# Altium PCB JH_2651M.PcbDoc (part 2 of 2)
Units mm, origin at the board's own origin, x right, y up, seen from the top; angles counter-clockwise.
Board outline 17.32 x 28.93 mm, 4 copper layers (TopLayer, MidLayer1, MidLayer2, BottomLayer); 57 components, 67 nets, 222 pads, 169 vias.
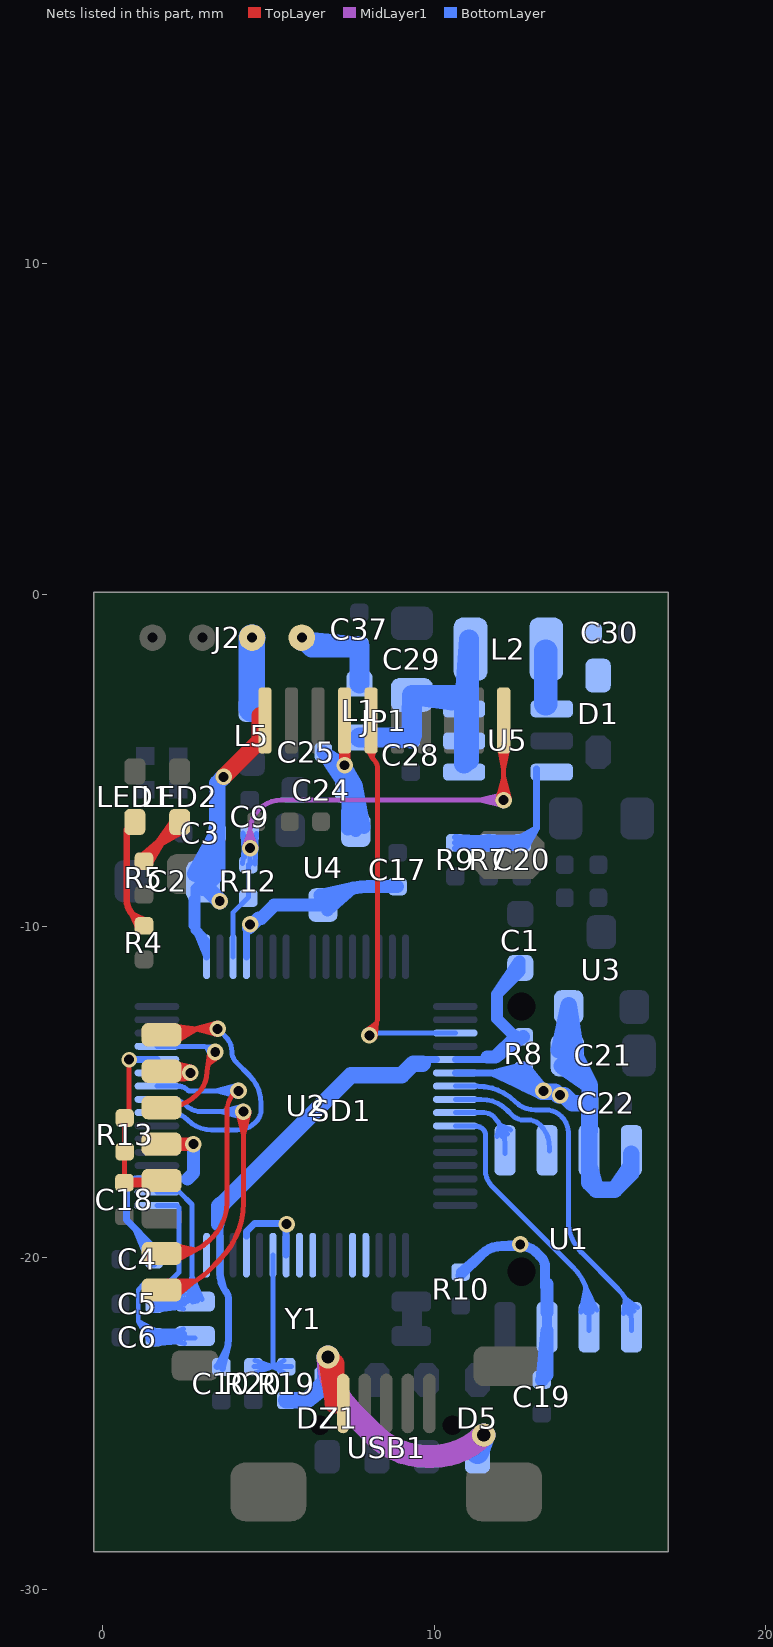
[diagram p4: the nets of this part, all layers, seen from the top]

## Via types
v1: diameter 0.5, hole 0.3, TopLayer to BottomLayer, tented both sides, 163 vias
v2: diameter 0.7, hole 0.4, TopLayer to BottomLayer, tented both sides, 5 vias
v3: diameter 0.47, hole 0.3, TopLayer to BottomLayer, tented both sides, 1 vias

## Nets (pads, with @x,y where several pads share a name; then routed paths per layer and width w, separated by ;. In a path a pad name is that pad's centre, name@x,y a point inside that pad or via, vN(x,y) a via of type N, cw(c..) or ccw(c..) an arc to the next point about the centre after c; other vN are vias at no path point) (continued)
MDP: JP1.5 U2.35 | length 14.1
  TopLayer w0.15: v1@7.908,-13.3 v1(8.05,-13.3) ccw(c7.451,-12.701) 8.298,-12.701 8.298,-5.265 ccw(c7.885,-5.265) 8.177,-4.973 cw(c8.363,-4.787) 8.1,-4.787 JP1.5@8.1,-4.65 ; v1@7.919,-13.184 8.269,-12.92 v1@8.216,-13.355 ; JP1.5@7.981,-4.638 8.135,-4.919 ; JP1.5@8.1,-4.6 8.135,-4.919 ; JP1.5@8.225,-4.611 8.135,-4.919
  BottomLayer w0.15: v1@7.9,-13.3 7.973,-13.227 U2.35@10.64,-13.227 ; 9.515,-13.227 U2.35@10.07,-13.227
MICBIAS: U2.57
MICP: U2.56
MICVREF: U2.52
NetC20_2: C20.2 R7.2 R9.1 U5.3 | length 32.3
  BottomLayer w0.2: R9.1@10.641,-7.658 R7.2@11.513,-7.637 ; R9.1@10.64,-7.492 R7.2@11.65,-7.492 C20.2@12.65,-7.492 13.09,-7.052 ; R9.1@10.641,-7.326 R7.2@11.513,-7.347 ; R9.1@10.696,-7.653 R7.2@11.513,-7.347 ; R9.1@10.696,-7.331 R7.2@11.513,-7.637 ; R7.2@11.621,-7.658 R9.1@10.771,-7.492 ; R7.2@11.621,-7.326 R9.1@10.771,-7.492 ; R7.2@11.637,-7.492 R9.1@10.771,-7.492 ; R7.2@11.663,-7.492 C20.2@12.529,-7.492 ; R7.2@11.679,-7.658 C20.2@12.529,-7.492 ; R7.2@11.679,-7.326 C20.2@12.529,-7.492 ; C20.2@12.56,-7.361 13.09,-7.052 ; C20.2@12.594,-7.653 R7.2@11.778,-7.345 ; C20.2@12.594,-7.331 R7.2@11.778,-7.639 ; C20.2@12.649,-7.658 R7.2@11.778,-7.639 ; C20.2@12.649,-7.326 R7.2@11.778,-7.345 ; C20.2@12.663,-7.492 13.09,-7.052 ; C20.2@12.797,-7.591 13.09,-7.052 ; U5.3@13.09,-5.26 13.09,-7.052 ; R9.1@10.653,-7.492 R7.2@11.519,-7.492 ; R9.1@10.653,-7.492 R7.2@11.513,-7.347 ; R9.1@10.653,-7.492 R7.2@11.519,-7.492 ; R9.1@10.653,-7.492 R7.2@11.513,-7.637 ; R7.2@11.519,-7.492 10.669,-7.326 R7.2@11.519,-7.492 ; R7.2@11.519,-7.492 10.669,-7.658 R7.2@11.519,-7.492 ; R7.2@11.771,-7.492 12.621,-7.658 R7.2@11.771,-7.492 ; R7.2@11.771,-7.492 12.621,-7.326 R7.2@11.771,-7.492 ; R7.2@11.771,-7.492 C20.2@12.637,-7.492 ; R7.2@11.771,-7.492 C20.2@12.637,-7.492 ; R7.2@11.778,-7.639 C20.2@12.637,-7.492 ; R7.2@11.778,-7.345 C20.2@12.637,-7.492
NetC30_2: C30.2 D1.1 L2.2 U5.1 | length 1.6
  BottomLayer w0.7: U5.1@13.372,-3.3 L2.2@13.372,-1.7
NetC37_1: C37.1 J2.1 L1.1 | length 9
  BottomLayer w0.6: J2.1@6.01,-1.3 J2.1@6.31,-1.6 ; C37.1@7.75,-1.558 L1.1@7.75,-2.687 C37.1@7.75,-1.6 ; J2.1@6.31,-1.6 7.737,-1.558 6.01,-1.4 C37.1@7.75,-1.6 ; J2.1@6.31,-1.6 C37.1@7.75,-1.6
NetLED1_1: LED1.1 R4.1 | length 4.9
  TopLayer w0.2: LED1.1@0.973,-6.862 0.731,-7.104 0.731,-9.228 ccw(c1.322,-9.228) 0.904,-9.646 ; R4.1@1.099,-10.085 0.904,-9.646 ; R4.1@1.237,-9.992 0.904,-9.646 ; R4.1@1.25,-9.992 0.904,-9.646 ; R4.1@1.335,-9.857 0.904,-9.646
NetLED2_1: LED2.1 R5.1 | length 7.5
  TopLayer w0.2: R5.1@1.145,-7.924 1.882,-7.307 ; R5.1@1.25,-8.042 1.25,-7.939 LED2.1@2.327,-6.862 ; R5.1@1.263,-8.042 1.882,-7.307 ; R5.1@1.399,-8.138 1.882,-7.307 ; LED2.1@2.165,-6.793 1.585,-7.604 ; LED2.1@2.327,-6.938 1.585,-7.604 ; LED2.1@2.454,-7.115 1.585,-7.604
PGND: J2.2 L5.1 | length 2.2
  BottomLayer w0.8: L5.1@4.5,-3.45 4.5,-1.324 cw(c4.534,-1.324) J2.2@4.51,-1.3
PWR_ON1: R19.2 R20.1 U2.59 | length 7.8
  BottomLayer w0.15: R20.1@4.563,-23.292 5.14,-23.292 ; R20.1@4.595,-23.481 5.14,-23.292 ; R20.1@4.595,-23.103 5.14,-23.292 ; R20.1@4.704,-23.292 5.14,-23.292 ; 5.14,-21.052 U2.59@5.14,-20.497 ; U2.59@5.14,-19.927 5.14,-23.292 ; R19.2@5.48,-23.478 5.14,-23.292 ; R19.2@5.48,-23.106 5.14,-23.292 ; R19.2@5.527,-23.292 5.14,-23.292 ; R19.2@5.7,-23.292 R19.2@5.54,-23.292 5.14,-23.292
SDC_CLK: 
SDC_CMD: SD1.3 U2.13 | length 7.2
  TopLayer w0.15: SD1.3@1.779,-15.479 1.9,-15.479 ccw(c1.9,-14.162) 2.831,-15.094 2.888,-15.037 ccw(c2.254,-14.404) 3.15,-14.404 cw(c4.004,-14.404) v1(3.4,-13.8) 3.179,-14.183 ; v1@3.234,-13.744 3.179,-14.183 ; v1@3.531,-13.916 3.179,-14.183
  BottomLayer w0.15: U2.13@1.64,-13.627 2.982,-13.627 cw(c2.982,-14.218) v1(3.4,-13.8) 3.135,-13.647 ; U2.13@2.21,-13.627 2.765,-13.627 ; v1@3.273,-13.92 3.135,-13.647 ; v1@3.44,-13.63 3.135,-13.647
SDC_DATA0: SD1.7 U2.10 | length 15.2
  TopLayer w0.15: SD1.7@1.779,-19.879 2.285,-19.879 ccw(c2.285,-18.585) 3.2,-19.5 3.326,-19.374 ; SD1.7@2.021,-19.754 2.817,-19.765 ; SD1.7@2.029,-19.879 2.817,-19.765 ; SD1.7@2.037,-19.604 2.817,-19.765 ; SD1.7@2.057,-20.001 2.817,-19.765 ; SD1.7@2.115,-20.14 2.817,-19.765 ; 3.326,-19.374 ccw(c2.301,-18.35) 3.75,-18.35 3.75,-15.604 cw(c4.604,-15.604) 4,-15 v1@4.1,-14.9
  BottomLayer w0.15: U2.10@1.64,-14.827 2.284,-14.827 cw(c2.284,-15.204) 2.55,-14.937 ccw(c2.631,-14.856) 2.631,-14.971 v1(4.1,-14.971) 3.4,-14.971 ; U2.10@2.21,-14.827 2.472,-14.877 ; v1@4.078,-15.145 3.4,-14.971 ; v1@4.078,-14.797 3.4,-14.971
SDC_DATA1: SD1.8 U2.9 | length 17.4
  TopLayer w0.15: SD1.8@1.779,-20.979 1.802,-20.979 ccw(c1.802,-19.002) 3.2,-20.4 3.543,-20.057 ccw(c1.836,-18.35) 4.25,-18.35 v1(4.25,-15.6) 4.25,-16.3 ; SD1.8@1.984,-20.708 2.791,-20.714 ; SD1.8@1.997,-20.858 2.791,-20.714 ; SD1.8@2.029,-20.979 2.791,-20.714 ; SD1.8@2.079,-21.094 2.791,-20.714 ; SD1.8@2.163,-21.22 2.791,-20.714 ; v1@4.076,-15.622 4.25,-16.3 ; v1@4.424,-15.622 4.25,-16.3
  BottomLayer w0.15: U2.9@2.05,-15.227 2.09,-15.227 cw(c2.09,-15.812) 2.503,-15.398 ccw(c2.99,-14.911) 2.99,-15.6 v1(4.25,-15.6) 3.55,-15.6 ; U2.9@2.21,-15.227 2.382,-15.305 ; v1@4.228,-15.774 3.55,-15.6 ; v1@4.228,-15.426 3.55,-15.6
SDC_DATA2: SD1.1 U2.8 | length 14.1
  TopLayer w0.15: SD1.1@1.798,-13.26 SD1.1@1.779,-13.279 1.958,-13.1 v1(3.473,-13.1) ; SD1.1@2.012,-13.155 2.845,-13.1 ; SD1.1@2.015,-13.004 2.845,-13.1 ; SD1.1@2.029,-13.279 2.845,-13.1 ; SD1.1@2.065,-13.399 2.845,-13.1 ; SD1.1@2.132,-13.534 2.845,-13.1 ; v1@3.451,-13.274 2.773,-13.1 v1@3.451,-12.926
  BottomLayer w0.15: U2.8@1.64,-15.627 2.026,-15.627 cw(c2.026,-16.388) 2.565,-15.85 ccw(c3.289,-15.126) 3.289,-16.15 4.062,-16.15 ccw(c4.062,-15.374) 4.611,-15.923 4.635,-15.898 ccw(c4.287,-15.55) 4.78,-15.55 4.78,-15.351 ccw(c3.591,-15.351) 4.431,-14.511 4.035,-14.114 cw(c4.36,-13.789) 3.9,-13.789 ccw(c3.268,-13.789) 3.715,-13.342 v1(3.473,-13.1) ; U2.8@2.21,-15.627 2.407,-15.729
SDC_DATA3: SD1.2 U2.11 | length 17.7
  TopLayer w0.15: SD1.2@1.779,-14.379 v1@2.602,-14.379 ; v1@2.544,-14.566 SD1.2@2.095,-14.112 ; v1@2.563,-14.275 SD1.2@2.095,-14.646 ; v1@2.579,-14.587 SD1.2@2.043,-14.255 ; v1@2.604,-14.258 SD1.2@2.043,-14.503 ; v1@2.612,-14.598 SD1.2@2.029,-14.379 ; v1@2.617,-14.599 SD1.2@1.947,-14.379 ; v1@2.639,-14.252 SD1.2@2.029,-14.379 ; v1@2.64,-14.252 SD1.2@1.947,-14.379 ; v1@2.647,-14.602 SD1.2@2.043,-14.503 ; v1@2.674,-14.254 SD1.2@2.043,-14.255 ; v1@2.69,-14.597 SD1.2@2.095,-14.646 ; v1@2.715,-14.264 SD1.2@2.095,-14.112 ; SD1.2@1.947,-14.379 v1(2.65,-14.427) ; SD1.2@2.029,-14.379 v1@2.602,-14.379 ; SD1.2@2.029,-14.379 v1(2.65,-14.427) ; SD1.2@2.043,-14.503 v1@2.602,-14.379 ; SD1.2@2.043,-14.503 v1(2.65,-14.427) ; SD1.2@2.043,-14.255 v1@2.602,-14.379 ; SD1.2@2.043,-14.255 v1(2.65,-14.427) ; SD1.2@2.095,-14.646 v1@2.602,-14.379 ; SD1.2@2.095,-14.646 v1(2.65,-14.427) ; SD1.2@2.095,-14.112 v1@2.602,-14.379 ; SD1.2@2.095,-14.112 v1(2.65,-14.427)
  BottomLayer w0.15: U2.11@1.79,-14.427 v1(2.65,-14.427) ; v1@2.615,-14.599 U2.11@2.21,-14.427 ; v1@2.615,-14.256 U2.11@2.21,-14.427 ; U2.11@2.21,-14.427 v1(2.65,-14.427) ; U2.11@2.21,-14.427 v1(2.65,-14.427)
SPI_CLK: U1.6 U2.40 | length 3.9
  BottomLayer w0.15: U2.40@10.64,-15.227 11.42,-15.227 ; U2.40@11.21,-15.227 11.42,-15.227 ; U1.6@13.486,-16.792 13.486,-16.689 ccw(c12.511,-16.689) 13.2,-16 ccw(c12.838,-16.362) 12.838,-15.85 12.7,-15.85 cw(c12.7,-15.367) 12.359,-15.709 12.2,-15.55 ccw(c11.42,-16.33) 11.42,-15.227
SPI_CS: U1.1 U2.39 | length 13.5
  BottomLayer w0.15: U2.39@10.64,-14.827 11.308,-14.827 cw(c11.308,-16.442) 12.45,-15.3 ccw(c13.054,-14.696) 13.054,-15.55 ; U2.39@11.21,-14.827 11.76,-14.892 ; 13.054,-15.545 13.354,-15.545 cw(c13.354,-16.246) 13.85,-15.75 cw(c13.367,-16.233) 14.05,-16.233 14.05,-18.884 ccw(c15.416,-18.884) 14.45,-19.85 15.55,-20.95 cw(c14.584,-21.916) 15.95,-21.916 U1.1@15.95,-22.1 U1.1@15.95,-22.2 ; U1.1@15.71,-21.69 15.767,-21.233 ; U1.1@15.862,-21.684 15.767,-21.233 ; U1.1@15.95,-21.655 15.767,-21.233 ; U1.1@16.031,-21.61 15.767,-21.233 ; U1.1@16.139,-21.504 15.767,-21.233
SPI_RX: U1.5 U2.41 | length 4.5
  BottomLayer w0.15: U2.41@10.64,-15.627 11.503,-15.627 ; U2.41@11.21,-15.627 11.503,-15.627 ; U1.5@11.899,-16.346 11.984,-15.99 ; U1.5@12.052,-16.35 11.984,-15.99 ; U1.5@12.14,-16.866 U1.5@12.14,-16.766 12.14,-16.571 ccw(c10.979,-16.571) 11.8,-15.75 ccw(c11.503,-16.047) 11.503,-15.627 ; U1.5@12.14,-16.321 11.984,-15.99 ; U1.5@12.218,-16.272 11.984,-15.99 ; U1.5@12.313,-16.151 11.984,-15.99
SPI_TX: U1.2 U2.42 | length 12.2
  BottomLayer w0.15: U2.42@10.64,-16.027 11.238,-16.027 cw(c11.238,-16.362) 11.475,-16.125 cw(c11.294,-16.306) 11.55,-16.306 11.55,-17.367 ccw(c12.233,-17.367) 11.75,-17.85 14.2,-20.3 cw(c13.041,-21.459) 14.68,-21.459 U1.2@14.68,-22.1 U1.2@14.68,-22.2 ; U2.42@11.21,-16.027 11.406,-16.072 ; U1.2@14.438,-21.649 14.581,-20.897 ; U1.2@14.588,-21.662 14.581,-20.897 ; U1.2@14.68,-21.655 14.581,-20.897 ; U1.2@14.771,-21.638 14.581,-20.897 ; U1.2@14.912,-21.586 14.581,-20.897
TF_CLK: C18.1 R13.1 R13.2 SD1.5 U2.12 | length 5.6
  TopLayer w0.15: C18.1@0.669,-17.732 R13.2@0.669,-16.808 R13.1@0.669,-15.792 ; R13.1@0.8,-15.822 v3(0.8,-14.03)
  TopLayer w0.3: C18.1@0.669,-17.732 SD1.5@1.726,-17.732
  BottomLayer w0.21: v3@0.803,-14.027 U2.12@1.64,-14.027
USB_5V: D5.1 DZ1.1 R19.1 USB1.1 | length 16.3
  TopLayer w0.6: v2(6.8,-23) 7,-23.2 7,-24.4 v2(6.8,-23)
  MidLayer1 w0.7: v2(6.8,-23) ccw(c9.094,-23) 7.472,-24.622 8.178,-25.328 ccw(c9.8,-23.706) 9.8,-26 9.931,-26 ccw(c9.931,-23.781) v2(11.5,-25.35)
  BottomLayer w0.5: R19.1@5.54,-24.308 6.161,-24.308 ; R19.1@5.553,-24.308 6.161,-24.308 ; DZ1.1@6.775,-23.821 6.161,-24.308 ; DZ1.1@6.775,-23.694 6.161,-24.308
  BottomLayer w0.6: DZ1.1@6.775,-23.694 v2(6.8,-23) 6.775,-23.567 6.775,-22.975 DZ1.1@6.775,-23.694
  BottomLayer w0.7: D5.1@11.308,-25.813 cw(c11.963,-25.813) v2(11.5,-25.35) 11.308,-25.879 v2@11.396,-25.486
V33_RTC: U2.64
VBAT: C28.1 C29.1 L1.2 L2.1 U5.4 U5.5 U5.6 | length 36.5
  BottomLayer w0.6: C28.1@9.287,-4.342 L1.2@7.75,-4.313 9.271,-4.313 9.33,-4.254 C29.1@9.33,-3.03 ; C28.1@9.3,-4.342 C29.1@9.33,-3.03 ; L2.1@11.05,-2.08 U5.5@10.908,-4.165 ; L2.1@11.05,-2.073 U5.5@10.908,-4.165 ; C29.1@9.33,-3.03 10.738,-3.03 9.457,-3.03 10.527,-3.2 C29.1@9.33,-3.03 ; U5.4@10.908,-5.105 11.05,-3.001 U5.5@10.908,-4.165 ; U5.4@10.908,-5.105 U5.6@10.908,-3.2 ; U5.4@10.908,-5.105 U5.5@10.908,-4.165 ; U5.5@10.908,-4.165 11.05,-5 ; U5.5@10.908,-4.165 11.05,-5 ; U5.5@10.908,-4.165 U5.6@10.908,-3.2 ; U5.5@10.908,-4.165 U5.6@10.908,-3.2 ; U5.6@10.908,-3.2 11.05,-1.35 11.05,-5 ; U5.6@10.908,-3.2 11.05,-5 ; U5.6@10.908,-3.2 11.05,-1.794 11.05,-4.102 U5.6@10.908,-3.2
VCC33_ADC: U2.53
VCC_12: C1.1 C10.1 R8.2 U2.37 U2.63 | length 24.5
  BottomLayer w0.21: C10.1@3.45,-23.292 ccw(c2.605,-22.447) 3.8,-22.447 3.8,-21.271 ccw(c3.361,-21.271) 3.752,-21.072 ; C10.1@3.463,-23.292 3.759,-22.756 C10.1@3.613,-23.351 ; U2.63@3.54,-20.497 3.659,-20.94 ; U2.63@3.54,-19.357 3.54,-18.622 ; 3.54,-18.36 U2.63@3.54,-19.927 3.54,-20.496 ccw(c4.428,-20.496) 3.671,-20.96 ; 9.335,-14.027 U2.37@10.07,-14.027 ; U2.37@10.64,-14.027 11.523,-14.027 ; U2.37@11.21,-14.027 11.523,-14.027 ; 11.6,-13.95 11.523,-14.027 ; R8.2@12.508,-13.342 R8.2@12.7,-13.342 ; 3.671,-20.96 ccw(c4.428,-20.496) 3.752,-21.072 ; 3.671,-20.96 cw(c3.361,-21.271) 3.752,-21.072
  BottomLayer w0.35: R8.2@12.508,-13.342 12.458,-13.342 12.442,-13.342 11.898,-12.798 11.898,-12.055 ; C1.1@12.577,-11.058 11.898,-12.055 ; C1.1@12.59,-11.058 12.59,-11.363 11.898,-12.055
  BottomLayer w0.4: 3.473,-19 3.473,-18.427 3.54,-18.36 ; 11.6,-13.95 11.85,-13.95 ; R8.2@12.458,-13.342 11.85,-13.95 ; R8.2@12.687,-13.342 11.85,-13.95
  BottomLayer w0.5: 3.634,-18.36 7.494,-14.5 9.021,-14.5 9.371,-14.15 9.65,-14.15
VCC_15: C24.1 C25.1 JP1.4 U4.2 | length 23.3
  TopLayer w0.35: JP1.4@7.3,-4.6 v1(7.3,-5.15) JP1.4@7.3,-3.8
  BottomLayer w0.4: U4.2@7.397,-7.066 C24.1@7.413,-5.9 ; U4.2@7.397,-7.021 C24.1@7.641,-5.733 ; U4.2@7.874,-6.971 C24.1@7.413,-5.9 ; U4.2@7.884,-7.021 C24.1@7.641,-5.733 ; C25.1@6.658,-4.763 C24.1@7.641,-5.733 ; C25.1@6.658,-4.763 C24.1@7.413,-5.9 ; C25.1@6.658,-4.763 v1(7.3,-5.15) ; C25.1@6.658,-4.763 v1(7.3,-5.15) ; C25.1@6.658,-4.75 C24.1@7.413,-5.9 ; C25.1@6.658,-4.75 v1(7.3,-5.15) ; C25.1@6.658,-4.75 v1(7.3,-5.15) ; C25.1@6.658,-4.75 C24.1@7.641,-5.733 ; v1(7.3,-5.15) C24.1@7.641,-5.733 ; v1(7.3,-5.15) C24.1@7.413,-5.9 ; v1(7.3,-5.15) C24.1@7.641,-5.733 ; v1(7.3,-5.15) C24.1@7.413,-5.9 ; C24.1@7.413,-5.9 U4.2@7.641,-7.107 C24.1@7.641,-5.733 ; C24.1@7.413,-5.9 7.641,-7.043 C24.1@7.641,-5.733
VCC_33: C2.1 C3.1 C4.1 C17.1 C19.1 C21.1 C22.1 JP1.1 R8.1 R10.1 SD1.4 U1.3 U1.7 U1.8 U2.3 U2.17 U2.20 U2.38 U2.58 U2.61 U3.2 U4.3 | length 110.2
  TopLayer w0.4: SD1.4@1.779,-16.579 2.713,-16.579 2.029,-16.579 v1(2.742,-16.579) SD1.4@1.779,-16.579
  TopLayer w0.5: v1(3.65,-5.5) 4.75,-4.4 JP1.1@4.75,-3.65
  BottomLayer w0.21: C4.1@1.415,-20.112 1.011,-19.161 ; C4.1@1.558,-20.2 C4.1@1.558,-20.05 1.558,-19.708 ; C4.1@1.688,-19.941 1.011,-19.161 ; U2.3@2.21,-17.627 2.565,-17.627 U2.3@1.64,-17.627 0.973,-17.627 0.72,-17.88 0.72,-18.87 1.558,-19.708 ; C2.1@3.03,-8.65 2.9,-8.98 2.81,-9.069 2.7,-9.18 2.7,-10 2.81,-10.11 ; U2.61@4.34,-19.357 4.34,-19.21 4.58,-18.97 5.467,-18.97 cw(c5.467,-19.073) v1@5.54,-19 ; U2.20@4.34,-10.927 v1@4.34,-10.16 ; 4.736,-9.764 v1@4.34,-10.16 ; U2.58@5.54,-19.927 v1@5.54,-19 ; U2.58@5.54,-19.357 v1@5.54,-19 ; U2.38@10.64,-14.427 R8.1@12.927,-14.427 ; U2.38@11.21,-14.427 11.945,-14.427 ; 12.639,-14.657 R8.1@12.927,-14.427 ; R8.1@12.661,-14.199 11.787,-14.427 ; R8.1@12.685,-14.52 11.787,-14.427 ; R8.1@12.687,-14.358 11.787,-14.427 ; 12.693,-14.883 11.824,-14.431 ; 12.696,-14.885 11.741,-14.427 ; R8.1@12.785,-14.609 11.741,-14.427 ; R8.1@12.787,-14.61 11.824,-14.431 ; 12.888,-14.793 R8.1@12.927,-14.427 ; 1.011,-19.161 C4.1@1.558,-20.037 ; C4.1@1.558,-20.037 1.558,-19.708 ; C4.1@1.558,-20.037 1.558,-19.708 ; 1.558,-19.708 1.401,-19.998 1.558,-19.708 ; 1.558,-19.708 1.715,-19.998 1.558,-19.708 ; 2.81,-10.11 3.14,-10.44 U2.17@3.14,-10.927 2.81,-10.11 ; v1@4.34,-10.16 4.34,-10.357 v1@4.34,-10.16 ; 11.741,-14.427 12.75,-14.75 ; 11.824,-14.431 12.75,-14.75 ; 12.75,-14.75 R8.1@12.927,-14.427
  BottomLayer w0.3: 3,-10.313 2.81,-10.124 2.81,-10.11 2.81,-9.069 2.81,-8.869 C2.1@3.03,-8.65 ccw(c3.259,-8.65) 3.083,-8.797 ccw(c3.259,-8.65) C2.1@3.097,-8.812 ; R10.1@10.8,-20.542 11.439,-19.903 ; R10.1@10.813,-20.442 11.439,-19.903 ; 12.948,-19.741 v1(12.6,-19.6) 12.05,-19.65 ; 13.4,-20.8 13.352,-20.883 13.352,-20.3 ccw(c12.899,-20.3) 13.219,-19.98 13.09,-19.85 ccw(c12.607,-20.333) 12.607,-19.65 12.05,-19.65 ; U1.3@13.41,-22.2 U1.3@13.41,-22.1 U1.3@13.41,-21.46 ; 11.439,-19.903 cw(c12.05,-20.514) 12.05,-19.65
  BottomLayer w0.4: 2.565,-17.627 2.742,-17.45 ; v1@4.409,-10.059 4.704,-9.764 4.736,-9.764 4.786,-9.764 5.182,-9.368 U4.3@6.65,-9.368 cw(c8.001,-10.719) 8.001,-8.808 ; U4.3@6.569,-9.073 7.506,-8.873 ; U4.3@6.65,-9.304 7.506,-8.873 ; U4.3@6.787,-9.507 7.506,-8.873 ; C17.1@8.887,-8.808 8.001,-8.808 ; C17.1@8.9,-8.808 8.001,-8.808 ; C19.1@13.25,-23.692 C19.1@13.41,-23.532 ; 13.4,-20.8 cw(c13.376,-20.824) 13.41,-20.824 ; U1.3@13.41,-21.655 13.41,-20.824 ; U1.3@13.41,-21.46 13.41,-20.824 ; 2.742,-17.45 v1(2.742,-16.579) 2.742,-17.45 ; C19.1@13.41,-23.532 13.41,-22.2 13.263,-23.692 13.41,-22.544 C19.1@13.41,-23.532
  BottomLayer w0.5: C2.1@2.792,-8.421 C3.1@3.458,-7.2 ; C2.1@2.793,-8.42 C3.1@3.458,-7.213 ; C2.1@3.03,-8.65 3.03,-8.85 3.083,-8.797 C2.1@3.458,-8.422 ; C2.1@3.097,-8.812 v1(3.534,-9.25) ; C2.1@3.281,-8.58 C3.1@3.458,-7.213 ; C2.1@3.281,-8.579 C3.1@3.458,-7.2 ; v1(3.65,-5.5) 3.458,-5.692 C3.1@3.458,-7.2 ; C21.1@13.764,-13.742 U3.2@14.059,-12.393 ; C21.1@13.765,-13.74 U3.2@14.059,-12.457 ; C21.1@13.848,-14.219 14.7,-14.808 ; C21.1@14.021,-14.027 14.7,-14.808 ; C21.1@14.235,-13.883 14.7,-14.808 ; C21.1@14.278,-13.756 U3.2@14.059,-12.393 ; C21.1@14.278,-13.755 U3.2@14.059,-12.457 ; U1.7@14.68,-17.13 14.692,-15.363 14.68,-16.321 C22.1@14.68,-15.35 ; C22.1@14.68,-15.3 C22.1@14.68,-15.35 ; C22.1@14.692,-15.337 14.7,-14.808 ; U1.8@15.95,-17.21 15.45,-17.95 ; U1.8@15.95,-16.866 15.95,-17.45 15.45,-17.95 ; C2.1@3.458,-8.422 C3.1@3.458,-7.2 ; C2.1@3.458,-8.422 C3.1@3.458,-7.213 ; C3.1@3.458,-7.213 3.03,-8.523 C3.1@3.458,-7.2 ; R8.1@12.7,-14.45 v1@13.25,-15 ; R8.1@12.7,-14.45 12.75,-14.75 ; R8.1@12.7,-14.45 12.75,-14.75 ; R8.1@12.7,-14.45 R8.1@12.7,-14.358 12.75,-14.75 ; 12.75,-14.75 v1@13.25,-15 ; 12.75,-14.75 v1@13.25,-15 ; 12.75,-14.75 12.713,-14.358 v1@13.25,-15 ; v1@13.25,-15 13.65,-15 13.75,-15.1 13.921,-15.1 14.17,-15.35 ; C21.1@14.059,-14.167 14.7,-14.808 ; C21.1@14.059,-14.167 U3.2@14.059,-12.457 ; C21.1@14.059,-14.167 U3.2@14.059,-12.443 U3.2@14.059,-12.393 ; U3.2@14.059,-12.457 14.021,-13.773 U3.2@14.059,-12.393 ; 14.17,-15.35 C22.1@14.68,-15.35 ; 14.17,-15.35 C22.1@14.692,-15.35 ; 14.68,-17.738 14.892,-17.95 ; 14.68,-17.738 U1.7@14.68,-17.21 ; 14.68,-17.738 U1.7@14.68,-17.21 ; 14.68,-17.738 U1.7@14.68,-16.766 C22.1@14.68,-15.35 ; U1.7@14.68,-17.21 14.892,-17.95 ; C22.1@14.68,-15.35 C22.1@14.692,-15.35 ; C22.1@14.692,-15.35 14.7,-15.35 14.7,-14.808 ; 14.892,-17.95 15.45,-17.95
  other v1: 5.55,-18.989 13.8,-15.101 13.3,-14.971 4.45,-9.949
X32KI: C6.1 U2.1 Y1.2 | length 25.8
  BottomLayer w0.15: C6.1@1.406,-22.504 1.077,-21.919 ; C6.1@1.537,-22.197 Y1.2@2.278,-22.212 ; C6.1@1.548,-22.604 Y1.2@2.267,-22.547 ; C6.1@1.568,-22.196 Y1.2@2.281,-22.329 ; C6.1@1.577,-22.603 Y1.2@2.275,-22.439 ; C6.1@1.578,-22.591 Y1.2@2.275,-22.421 ; C6.1@1.583,-22.197 Y1.2@2.278,-22.385 ; C6.1@1.584,-22.577 Y1.2@2.278,-22.385 ; C6.1@1.589,-22.211 Y1.2@2.275,-22.421 ; C6.1@1.59,-22.224 Y1.2@2.275,-22.439 ; C6.1@1.598,-22.575 Y1.2@2.281,-22.329 ; C6.1@1.618,-22.231 Y1.2@2.267,-22.547 ; C6.1@1.627,-22.566 Y1.2@2.278,-22.212 ; U2.1@1.64,-18.427 2.242,-18.427 2.3,-18.485 2.3,-20.45 1.95,-20.8 1.25,-20.8 1.077,-20.973 1.077,-21.919 ; C6.1@1.671,-22.232 1.077,-21.919 ; Y1.2@2.438,-22.151 C6.1@1.736,-22.421 ; Y1.2@2.467,-22.595 C6.1@1.736,-22.421 ; Y1.2@2.477,-22.296 C6.1@1.736,-22.421 ; Y1.2@2.486,-22.371 C6.1@1.736,-22.421 ; Y1.2@2.487,-22.446 C6.1@1.736,-22.421 ; Y1.2@2.786,-22.421 1.579,-22.421 C6.1@1.558,-22.4 ; 1.077,-21.919 C6.1@1.558,-22.4 ; 1.077,-21.919 C6.1@1.558,-22.387 ; C6.1@1.558,-22.4 Y1.2@2.275,-22.421 ; C6.1@1.558,-22.387 Y1.2@2.278,-22.212 ; C6.1@1.558,-22.387 Y1.2@2.281,-22.329 ; C6.1@1.558,-22.387 Y1.2@2.278,-22.385 ; Y1.2@2.267,-22.547 1.558,-22.413 Y1.2@2.275,-22.439
X32KO: C5.1 U2.2 Y1.1 | length 26.7
  BottomLayer w0.15: C5.1@1.523,-21.199 Y1.1@2.26,-21.158 ; C5.1@1.551,-21.196 Y1.1@2.295,-21.264 ; C5.1@1.558,-21.604 Y1.1@2.324,-21.507 ; C5.1@1.558,-21.413 Y1.1@2.324,-21.507 ; C5.1@1.558,-21.196 Y1.1@2.294,-21.293 ; C5.1@1.565,-21.196 Y1.1@2.309,-21.321 ; C5.1@1.577,-21.209 Y1.1@2.319,-21.38 ; C5.1@1.587,-21.589 Y1.1@2.319,-21.38 ; C5.1@1.599,-21.575 Y1.1@2.309,-21.321 ; C5.1@1.605,-21.227 Y1.1@2.324,-21.507 ; C5.1@1.607,-21.573 Y1.1@2.294,-21.293 ; C5.1@1.614,-21.571 Y1.1@2.295,-21.264 ; U2.2@1.64,-18.027 2.327,-18.027 ; C5.1@1.641,-21.56 Y1.1@2.26,-21.158 ; Y1.1@2.442,-21.55 C5.1@1.736,-21.293 ; Y1.1@2.463,-21.105 C5.1@1.736,-21.293 ; Y1.1@2.479,-21.404 C5.1@1.736,-21.293 ; Y1.1@2.486,-21.329 C5.1@1.736,-21.293 ; Y1.1@2.486,-21.254 C5.1@1.736,-21.293 ; Y1.1@2.561,-21.321 2.7,-20.568 ; Y1.1@2.711,-21.334 2.7,-20.568 ; Y1.1@2.786,-21.329 2.7,-20.568 ; Y1.1@2.86,-21.317 2.7,-20.568 ; Y1.1@3.004,-21.271 2.7,-20.568 ; C5.1@1.558,-21.387 Y1.1@2.294,-21.293 ; C5.1@1.558,-21.387 Y1.1@2.26,-21.158 ; C5.1@1.558,-21.387 Y1.1@2.295,-21.264 ; C5.1@1.558,-21.387 Y1.1@2.309,-21.321 ; Y1.1@2.319,-21.38 C5.1@1.558,-21.4 1.665,-21.293 2.7,-21.293 2.7,-18.4 2.327,-18.027 ; 2.327,-18.027 2.21,-18.027 2.327,-18.027
XCLK: C9.1 JP1.10 R12.1 R12.2 U2.19 | length 27.2
  TopLayer w0.15: v1@11.926,-6.178 12.1,-5.5 v1@12.274,-6.178 ; JP1.10@11.976,-4.612 12.1,-5.25 ; v1(12.1,-6.2) JP1.10@12.1,-3.8 ; JP1.10@12.1,-4.6 12.1,-5.25 ; JP1.10@12.224,-4.612 12.1,-5.25
  MidLayer1 w0.15: v1@4.278,-7.62 4.45,-7.139 ; v1(4.45,-7.65) 4.45,-7.139 ; v1@4.622,-7.62 4.45,-7.139 ; v1@12.078,-6.374 11.4,-6.2 v1@12.078,-6.026 ; v1(12.1,-6.2) 5.389,-6.2 ccw(c5.389,-7.139) 4.725,-6.475 ccw(c5.389,-7.139) 4.45,-7.139
  BottomLayer w0.15: U2.19@3.94,-10.927 3.94,-9.587 4.4,-9.127 R12.1@4.4,-8.142 ; R12.1@4.224,-8.109 v1@4.282,-7.601 ; C9.1@4.239,-7.232 v1@4.282,-7.698 ; C9.1@4.252,-7.234 v1@4.281,-7.694 ; C9.1@4.27,-7.26 v1@4.279,-7.689 ; v1@4.281,-7.695 4.238,-7.194 R12.1@4.281,-7.931 ; R12.1@4.442,-8.142 C9.1@4.442,-7.208 C9.1@4.442,-7.158 ; R12.1@4.604,-8.124 v1@4.623,-7.626 ; C9.1@4.61,-7.271 v1@4.622,-7.682 ; C9.1@4.619,-7.236 v1@4.622,-7.683 ; v1@4.62,-7.691 C9.1@4.646,-7.206 ; v1@4.621,-7.688 C9.1@4.632,-7.234 ; R12.1@4.281,-7.931 v1@4.281,-7.603 ; R12.1@4.281,-7.931 v1@4.281,-7.603 ; R12.1@4.281,-7.931 v1@4.281,-7.603
pads on no net: SD1.0 SD1.9 U1. U2.4 U2.24 U2.51 U2.60 USB1. USB1.4

## Polygon pours and split planes (outlines as drawn)
GND on MidLayer2 "M2-GND" (hatched 45Degree grid 0.15 track 0.15, remove dead copper, pour order 6): 1.284,-28.478 1.284,-23.478 -0.001,-23.478 -0.001,0.022 0.399,0.022 16.999,0.022 16.999,-23.478 15.249,-23.478 15.299,-23.478 15.299,-28.478 1.299,-28.478
GND on BottomLayer "BOT-GND" (hatched 45Degree grid 0.15 track 0.15, remove dead copper, pour order 7): -0.042,0.039 16.958,0.039 16.958,-23.461 15.258,-23.461 15.258,-28.461 14.958,-28.461 1.243,-28.461 1.243,-23.461 -0.042,-23.461 -0.042,0.039
GND on TopLayer "TOP-GND" (hatched 45Degree grid 0.15 track 0.15, remove dead copper, pour order 9): -0.044,0.006 -0.044,-23.444 1.156,-23.444 1.191,-23.444 1.191,-28.444 15.206,-28.444 15.206,-23.444 16.906,-23.444 16.906,0.056 -0.094,0.056
GND on MidLayer1 "M1-GND" (hatched 45Degree grid 0.15 track 0.15, remove dead copper, pour order 10): 1.284,-28.478 1.284,-23.478 -0.001,-23.478 -0.001,0.022 1.558,0.022 16.999,0.022 16.999,-7.028 16.999,-23.478 15.299,-23.478 15.299,-28.478 14.899,-28.478 1.299,-28.478
VCC_33 on MidLayer1 "Top-3.3V" (hatched 45Degree grid 0.15 track 0.15, remove dead copper, pour order 8): 13.85,-11.578 14.15,-11.878 14.15,-14.75 14.15,-20.274 13.45,-20.974 12.657,-21.766 10.7,-21.766 3.324,-21.766 2.6,-21.042 2.55,-20.992 2.55,-16.45 2.55,-11.4 2.55,-9.35 2.85,-9.05 3,-8.9 3.473,-8.9 4.613,-8.9 4.8,-9.087 5.856,-10.143 8.95,-10.143 12.415,-10.143 13.85,-11.578

## Keep-outs
KeepOutLayer:
  circle w0.127: c16.3,-3.5 r0.5
  circle w0.127: c2.3,-24 r0.5
  circle w0.127: c0.7,-3.5 r0.5
  circle w0.127: c14.7,-24 r0.5
  lines w0.127: 4.183,-28.5 12.958,-28.5 ; 15.3,-26.309 15.3,-23.5 ; 15.3,-23.5 17,-23.5 ; 15.3,-23.5 17,-23.5 ; 15.3,-23.5 17,-23.5 ; 15.3,-23.5 15.3,-28.5 1.285,-28.5 1.285,-23.5 0,-23.5 0,0 17,0 17,-23.5 ; 15.3,-23.5 17,-23.5

## Other copper
TopLayer:
  rectangle net GND: 3.432,-28.25 6.422,-26.17
  rectangle net GND: 10.543,-28.25 13.55,-26.17
  rectangle net GND: 11.601,-24.294 12.988,-22.328
  rectangle net GND: 11.54,-8.95 12.844,-6.821
  text "L1" at -0.05,-24.929 h0.8
MidLayer1:
  text "L2" at -0.05,-26.179 h0.8
MidLayer2:
  text "L3" at -0.05,-27.4 h0.8
BottomLayer:
  rectangle net NetC30_2: 13.09,-2.85 15,-0.9
  rectangle net NetC37_1: 5.55,-2.55 6.95,-0.871
  rectangle net DC: 0.935,-2.214 1.95,-0.778
  rectangle net DV: 2.47,-2.634 3.45,-0.811
  rectangle net GND: 4.51,-6.175 5.81,-4.756
  text "L4" at -0.05,-28.6 h0.8

## Silkscreen, mask and mechanical layers (free items; w line width, h text height)
TopOverlay:
  circle w0.5: c10.95,-22.35 r0.224
  rectangle: 0.84,-1.95 6.7,-0.699
  rectangle: 11.1,-25.8 11.9,-24.858
  rectangle: 4.55,-2.8 12.526,-0.647
  rectangle: 4.51,-5.4 12.55,-4.8
  text "2651M" at 14.989,-4.937 h1.02 r90
BottomOverlay:
  text "-" at 4.35,-2.016 h1 r180
  text "+" at 6.558,-2.35 h1 r90
  text "DC" at 2.15,-3.114 h0.8
  text "DV" at 3.8,-3.167 h0.8
TopSolder:
  rectangle: 6.654,-28.374 10.538,-26.65
  rectangle: 11.95,-25.5 13.361,-23.879
  rectangle: 4,-25.45 5.5,-24
  rectangle: 2.575,-4.05 3.25,-2.6
  rectangle: 13.05,-4.1 13.76,-2.4
BottomSolder:
  rectangle: 1,-2.1 1.9,-0.9
  rectangle: 2.6,-2.15 3.45,-1
  rectangle: 4.05,-2.2 5.05,-0.75
  rectangle: 5.6,-2.2 6.9,-0.9